# Altium PCB PCB_RE2-YM2413 REV.0.1a_2023-12-21.pcbdoc
Units mil, origin at the board's own origin, x right, y up, seen from the top; angles counter-clockwise.
Board outline 8165 x 6545 mil, 2 copper layers (Top Layer, Bottom Layer); 78 components, 47 nets, 264 pads, 3 vias.
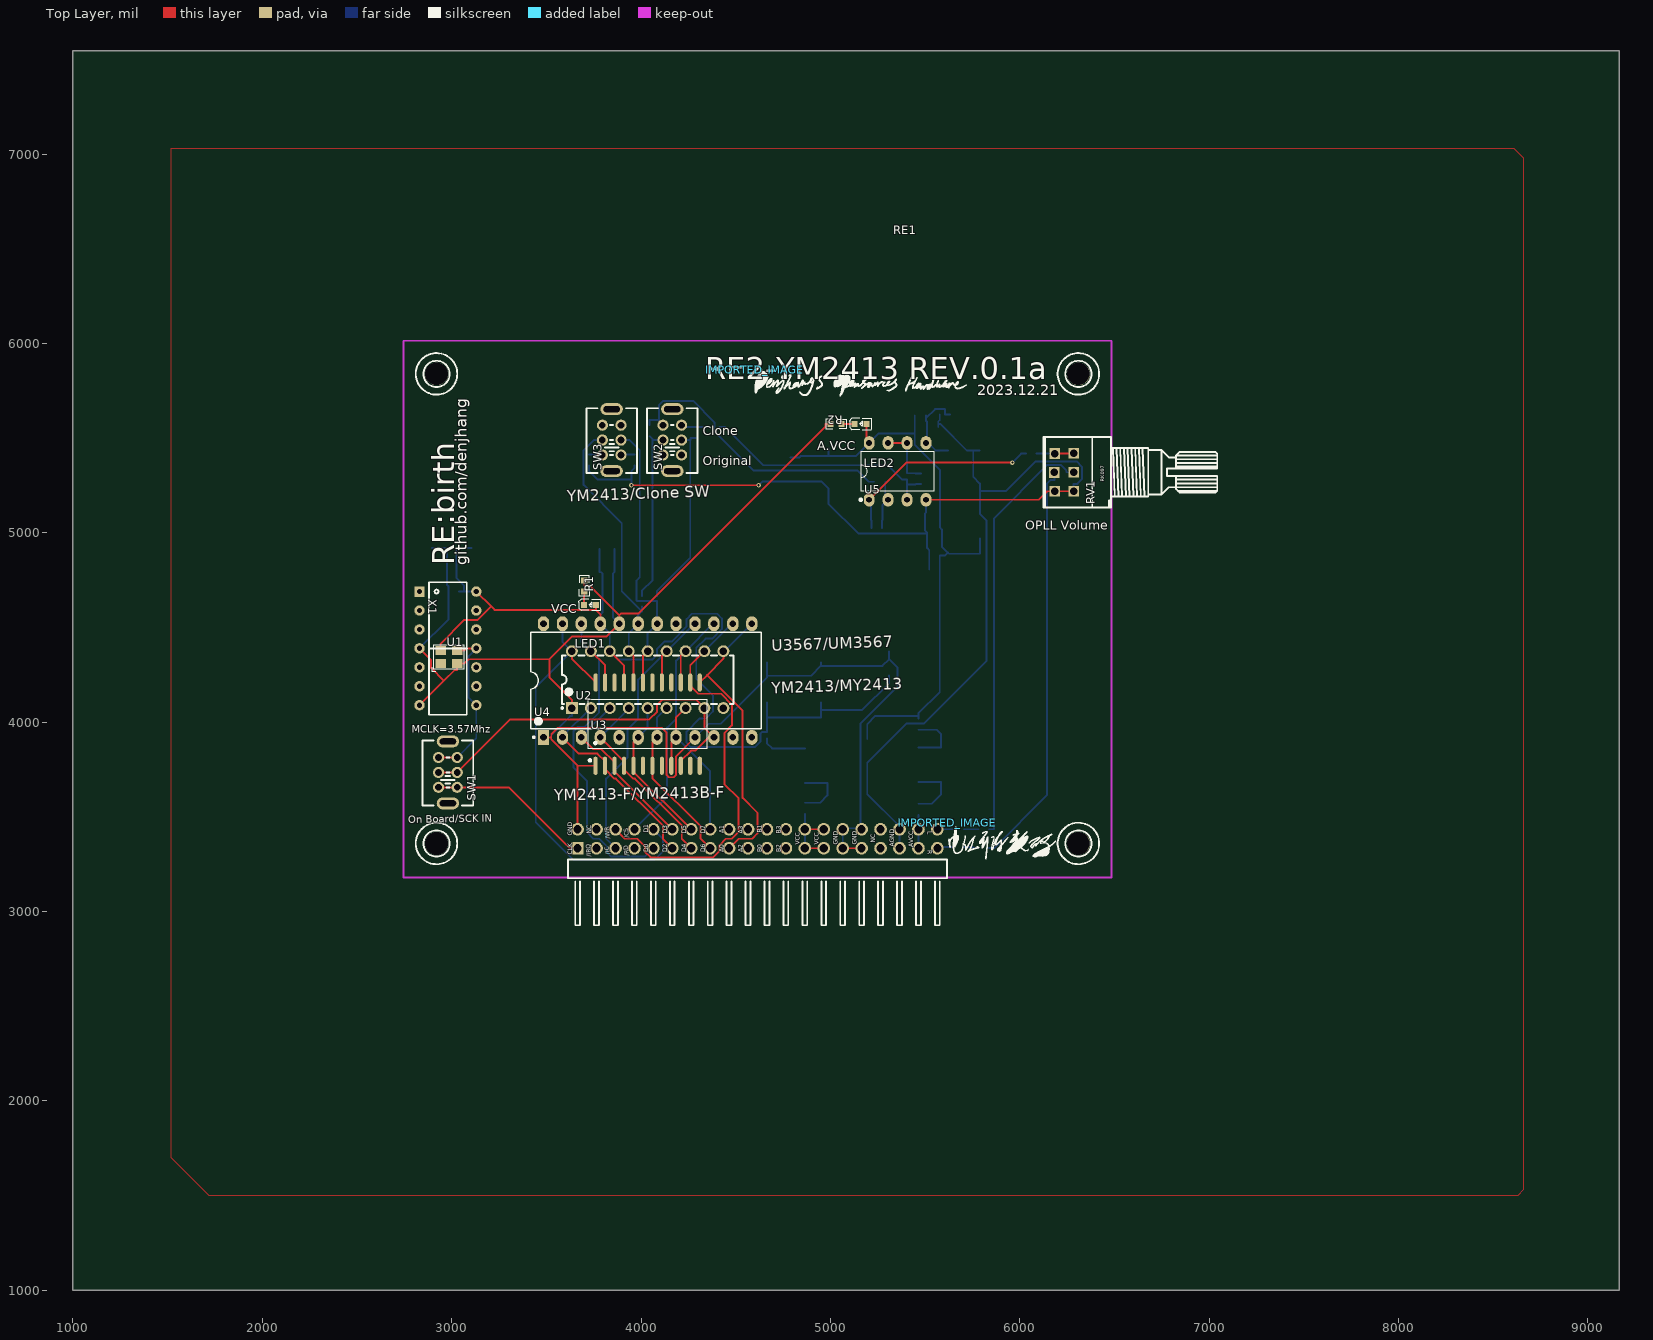
[diagram p0: Top Layer view]
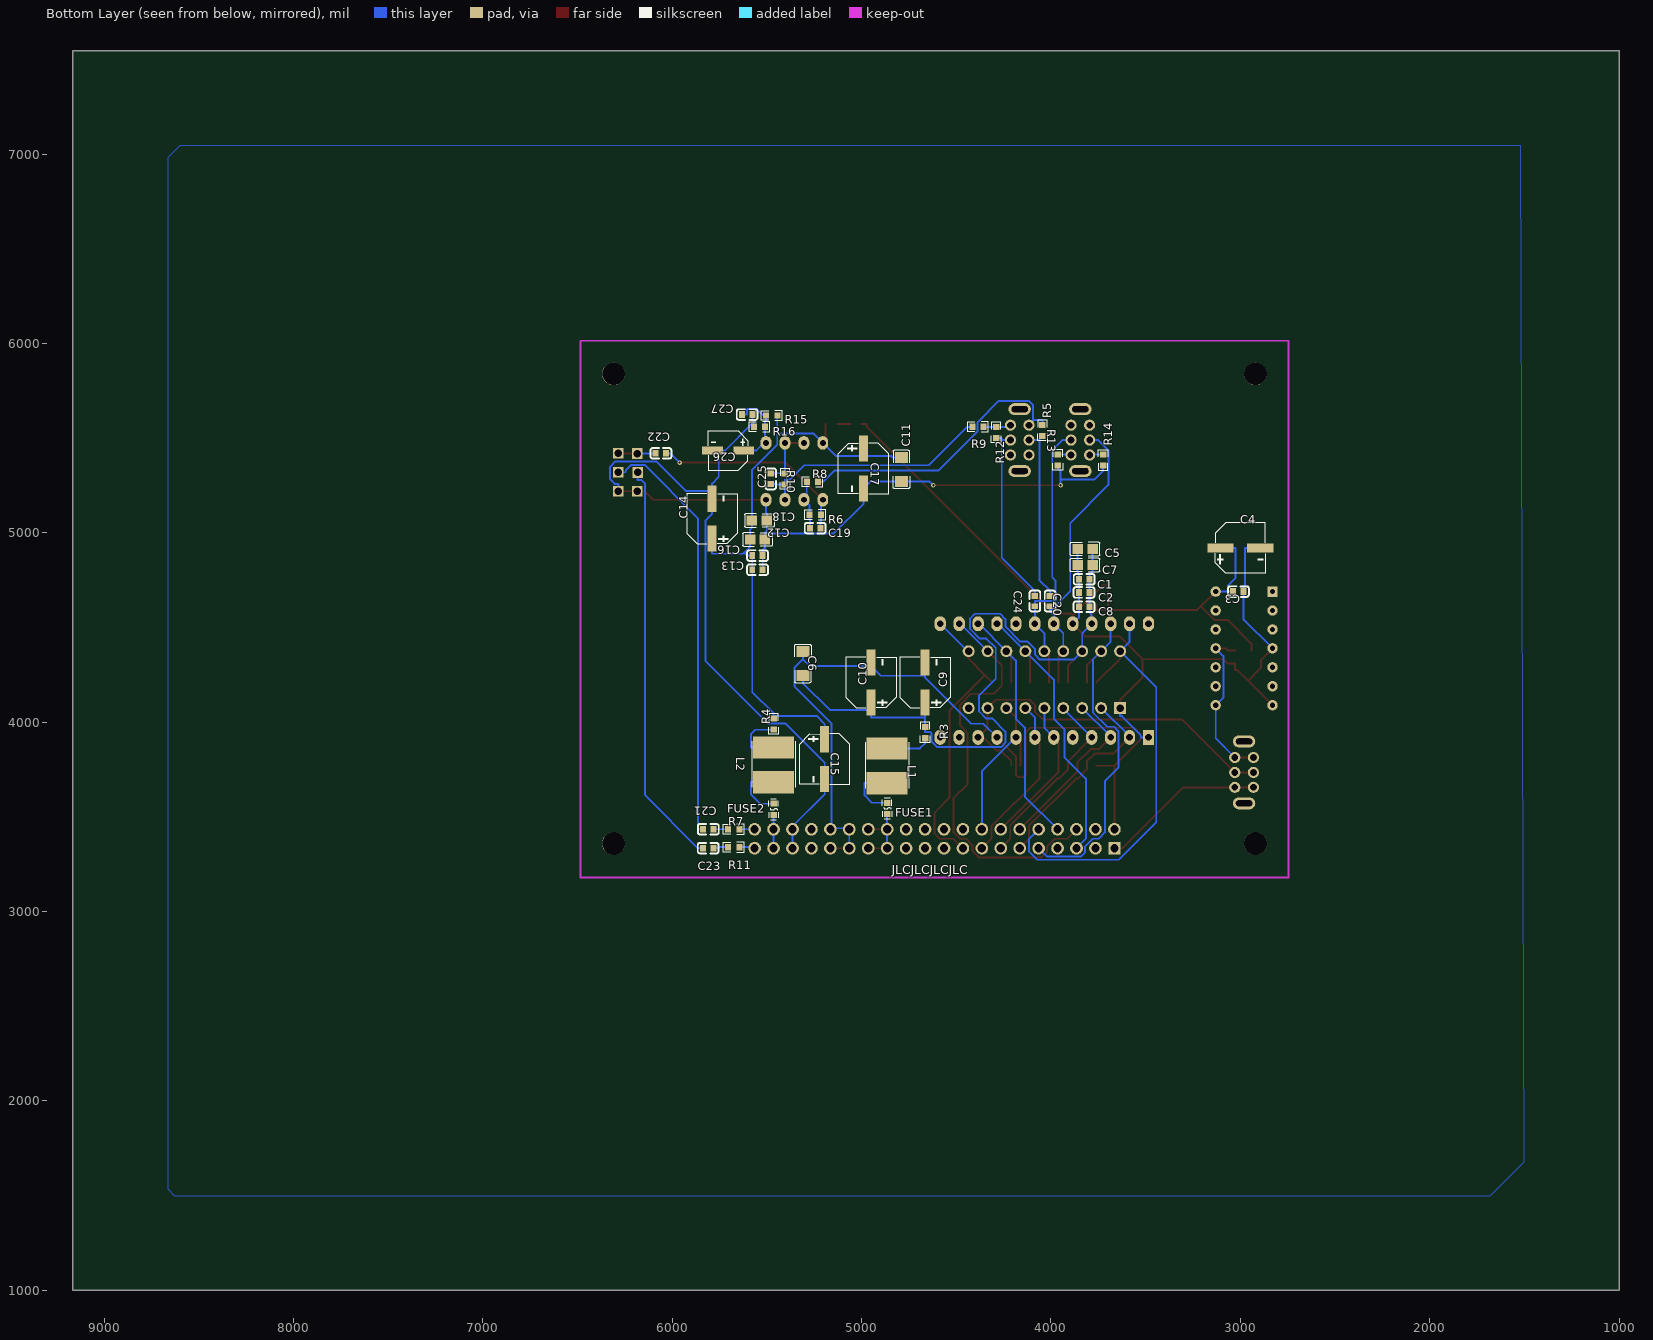
[diagram p1: Bottom Layer view, seen from below]

## Layer stack, top to bottom
Top Layer: signal copper (thickness not stored)
Dielectric: dielectric 12.6, FR-4, Dk 4.8
Bottom Layer: signal copper (thickness not stored)

## Board outline
9165,1000 1000,1000 1000,7545 9165,7545

## Components (designator, comment, footprint, x,y, rotation, side; value= is the part's Value field where it differs from the comment)
C1 "0.1u" C0603 3825,4755 r180 bottom
C2 "0.1u" C0603 3825,4685 r0 bottom
C3 "100u" C0603 3010,4690 r180 bottom
C4 "47u" CAP-SMD_BD6.3-L6.6-W6.6-LS7.2-FD 3000,4920 r0 bottom
C5 "0.1u" C0805 3820,4915 r0 bottom
C6 "100u" C1206 5310,4310 r90 bottom
C7 "47u" C0805 3820,4830 r0 bottom
C8 "0.1u" C0603 3825,4610 r0 bottom
C9 "470uF" CAP-SMD_BD6.3-L6.6-W6.6-FD 4665,4210 r270 bottom
C10 "220uF" CAP-SMD_BD6.3-L6.6-W6.6-LS7.2-FD 4950.01,4210.02 r270 bottom
C11 "100u" C1206 4790,5335 r270 bottom
C12 "47u" C0805 5550,4965 r180 bottom
C13 "0.1u" C0603 5550,4805 r180 bottom
C14 "470uF" CAP-SMD_BD6.3-L6.6-W6.6-FD 5790,5075 r270 bottom
C15 "220uF" CAP-SMD_BD6.3-L6.6-W6.6-LS7.2-FD 5195,3805 r90 bottom
C16 "0.1u" C0603 5550,4880 r180 bottom
C17 "220uF" CAP-SMD_BD6.3-L6.6-W6.6-LS7.2-FD 4990,5340 r90 bottom
C18 "47u" C0805 5540,5065 r180 bottom
C19 "120p" C0603 5245,5025 r0 bottom
C20 "4.7u" C0603 4005,4640 r90 bottom
C21 "4.7u" C0603 5810,3435 r180 bottom
C22 "4.7u" C0603 6060,5420 r180 bottom
C23 "4.7u" C0603 5810,3335 r0 bottom
C24 "4.7u" C0603 4085,4640 r90 bottom
C25 "120p" C0603 5480,5285 r270 bottom
C26 "10uF" CAP-SMD_BD5.0-L5.3-W5.3-LS6.0-FD 5705,5435 r180 bottom
C27 "0.1u" C0603 5605,5625 r180 bottom
FUSE1 "PPTC0.5A/24V-0603" F0603 4865,3545 r270 bottom
FUSE2 "PPTC0.5A/24V-0603" F0603 5465,3540 r270 bottom
IMPORTED_IMAGE "IMPORTED_IMAGE" IMPORTED_IMAGE 4599.81,5861.1 r0 top
IMPORTED_IMAGE "IMPORTED_IMAGE" IMPORTED_IMAGE 5617.49,3470.2 r0 top
L1 "470uH" IND-SMD_L5.8-W5.2 4865,3770 r90 bottom
L2 "470uH" IND-SMD_L5.8-W5.2 5465,3775 r90 bottom
LED1 "LED0603" LED0603-RD 3730,4620 r0 top
LED2 "LED0603" LED0603-RD 5160,5575 r0 top
R1 "20k" R0603#1 3700,4720 r90 top
R2 "20k" R0603#1 5030,5575 r180 top
R3 "10r" R0603#2 4665,3945 r270 bottom
R4 "10r" R0603#2 5465,3990 r270 bottom
R5 "20k" R0603#2 4045,5540 r270 bottom
R6 "220k" R0603#2 5245,5095 r0 bottom
R7 "2k2" R0603#2 5675,3435 r0 bottom
R8 "20k" R0603#2 5260,5270 r0 bottom
R9 "20k" R0603#2 4385,5560 r0 bottom
R10 "220k" R0603#2 5405,5285 r270 bottom
R11 "2k2" R0603#2 5675,3340 r0 bottom
R12 "20k" R0603#2 4290,5530 r270 bottom
R13 "20k" R0603#2 3965,5385 r270 bottom
R14 "20k" R0603#2 3725,5385 r90 bottom
R15 "10k" R0603#2 5475,5620 r0 bottom
R16 "10k" R0603#2 5540,5560 r0 bottom
RE1 "REBIRTH SOUND BOARD" "REBIRTH SOUND BOARD" 2741.16,3179.6 r0 top
RV1 "10kΩ" RK097G-DJ 6285,5320 r90 top
SW1 "SS-22D07" SW-TH_SS-22D07 2980,3735 r90 top
SW2 "SS-22D07" SW-TH_SS-22D07 4165,5490 r90 top
SW3 "SS-22D07" SW-TH_SS-22D07 3845,5490 r90 top
U1 "3.579545MHz" OSC-SMD_4P-L3.2-W2.5-BL 2985,4345 r0 top
U2 "YM2413" DIP-18_方孔IC插座 4035,4225 r0 top
U3 "YM2413-F" SOIC24-YMF276 4010,4010 r0 top
U4 "UM3567" DIP-24_L31.0-W13.5-P2.54-LS15.2-BL 4035,4220 r0 top
U5 "NE5532-DJ" DIP-8-DJ 5355,5325 r0 top
X1 "直插有源晶振" DIP14-有源晶振 2975,4390 r270 top
? "" ? 3205.04,2881.91 r0 top
? "" ? 6025.04,2705.59 r0 top
? "" ? 7279.18,3767.1 r0 top
? "" ? 6398.59,6161.46 r0 top
? "" ? 6686.17,5927.03 r0 top
? "" ? 2598.14,5928.19 r0 top
? "" ? 2832.57,6215.77 r0 top
? "" ? 2598.14,3268.19 r0 top
? "" ? 2832.57,3555.77 r0 top
? "" ? 7215.97,4931.81 r0 top
? "" ? 7387.65,5767.12 r0 top
? "" ? 7032.39,5569.72 r0 top
? "" ? 6633.02,3271.01 r0 top
? "" ? 6398.6,2983.43 r0 top
? "" ? 4614.93,6256.38 r0 top
? "" ? 6796.66,4596.92 r0 top

## Footprints (in the part's own frame and the unit in brackets; to place one, negate y for a bottom-side part, rotate by r counter-clockwise, add the part's x,y. Pads: shape width x height; smd on the part's side, far side on the other; paste and mask are expansions set on the pad)
C0603 [mm]
  rect 0.8x0.9 smd paste+0 mask+0.051: 1(0.7,0) 2(-0.7,0)
  silkscreen extent -1.39,-0.72 1.41,0.71
C0805 [mm]
  rect 1.41x1.35 smd paste-100 mask+0.051: 1(1,0) 2(-1,0)
  silkscreen extent -1.96,-0.9 1.96,0.9
C1206 [mm]
  rect 1.485x1.728 smd paste-100 mask+0.051: 1(1.593,0) 2(-1.593,0)
  silkscreen extent -2.56,-1.09 2.56,1.09
CAP-SMD_BD5.0-L5.3-W5.3-LS6.0-FD [mm]
  rect 2.8x1.1 smd paste+0 mask+0.051: 1(2.1,0) 2(-2.1,0)
  silkscreen extent -2.66,-2.65 2.66,2.62
CAP-SMD_BD6.3-L6.6-W6.6-FD [mm]
  rect 3.5x1.2 smd paste+0 mask+0.051: 1(2.67,0) 2(-2.67,0)
  silkscreen extent -3.38,-3.38 3.38,3.38
CAP-SMD_BD6.3-L6.6-W6.6-LS7.2-FD [mm]
  rect 3.5x1.2 smd paste+0 mask+0.051: 1(2.67,0) 2(-2.67,0)
  silkscreen extent -3.38,-3.38 3.38,3.38
DIP14-有源晶振 [mil]
  rect 55x55 hole 28 paste+0 mask+2: 1(-300,-145)
  round 55 hole 28 paste+0 mask+2: 2(-200,-145) 3(-100,-145) 4(0,-145) 5(100,-145) 6(200,-145) 7(300,-145) 8(300,155) 9(200,155) 10(100,155) 11(0,155) 12(-100,155) 13(-200,155) 14(-300,155)
  silkscreen extent -350,-95 350,105
DIP-8-DJ [mm]
  oval 1.46x1.825 hole 0.8 paste+0 mask+0.051: 1(-3.81,-3.81) 2(-1.27,-3.81) 3(1.27,-3.81) 4(3.81,-3.81) 5(3.81,3.81) 6(1.27,3.81) 7(-1.27,3.81) 8(-3.81,3.81)
  silkscreen extent -5.1,-3.96 4.87,2.67
DIP-18_方孔IC插座 [mm]
  rect 1.6x1.6 hole 1 paste+0 mask+0.051: 1(-10.16,-3.81)
  round 1.6 hole 1 paste+0 mask+0.051: 2(-7.62,-3.81) 3(-5.08,-3.81) 4(-2.54,-3.81) 5(0,-3.81) 6(2.54,-3.81) 7(5.08,-3.81) 8(7.62,-3.81) 9(10.16,-3.81) 10(10.16,3.81) 11(7.62,3.81) 12(5.08,3.81) 13(2.54,3.81) 14(0,3.81) 15(-2.54,3.81) 16(-5.08,3.81) 17(-7.62,3.81) 18(-10.16,3.81)
  silkscreen extent -11.58,-3.93 11.5,3.25
DIP-24_L31.0-W13.5-P2.54-LS15.2-BL [mm]
  rect 1.5x2 hole 0.9 paste+0 mask+0.051: 1(-13.97,-7.62)
  oval 1.5x2 hole 0.9 paste+0 mask+0.051: 2(-11.43,-7.62) 3(-8.89,-7.62) 4(-6.35,-7.62) 5(-3.81,-7.62) 6(-1.27,-7.62) 7(1.27,-7.62) 8(3.81,-7.62) 9(6.35,-7.62) 11(11.43,-7.62)
  oval 1.524x2 hole 0.9 paste+0 mask+0.051: 10(8.89,-7.62) 12(13.97,-7.62) 13(13.97,7.62) 14(11.43,7.62) 15(8.89,7.62) 16(6.35,7.62) 17(3.81,7.62) 18(1.27,7.62) 19(-1.27,7.62) 20(-3.81,7.62) 21(-6.35,7.62) 22(-8.89,7.62) 23(-11.43,7.62) 24(-13.97,7.62)
  silkscreen extent -15.66,-7.74 15.24,6.48
F0603 [mil]
  rect 31.75x34.02 smd paste-3937.01 mask+2: 1(29.66,0) 2(-29.66,0)
  silkscreen extent -55,-25 55,25
IMPORTED_IMAGE [mil]
  silkscreen extent 0,-139 1120,0
IND-SMD_L5.8-W5.2 [mm]
  rect 3x5.5 smd paste-100 mask+0.05: 1(-2.325,0) 2(2.325,0)
  silkscreen extent -3,-2.92 3.15,2.92
LED0603-RD [mm]
  rect 0.8x0.8 smd paste+0 mask+0.051: 1(-0.799,-0.003) 2(0.799,0.004)
  silkscreen extent -1.49,-0.75 1.39,0.76
OSC-SMD_4P-L3.2-W2.5-BL [mm]
  rect 1.4x1.2 smd paste+0 mask+0.051: 1(-1.1,-0.875) 2(1.1,-0.875) 3(1.1,0.875) 4(-1.1,0.875)
  silkscreen extent -2.29,-1.9 2.03,1.65
R0603#1 [mil]
  rect 31.75x34.02 smd paste-3937.01 mask+2: 1(-29.65,0) 2(29.65,0)
  silkscreen extent -55,-26 55,26
R0603#2 [mil]
  rect 31.75x34.02 smd paste-3937.01 mask+2: 1(29.66,0) 2(-29.66,0)
  silkscreen extent -55,-26 55,26
"REBIRTH SOUND BOARD" [mil]
RK097G-DJ [mil]
  rect 56x56 hole 39.4 paste+0 mask+4: 1(-100,0) 2(0,0) 3(100,0) 4(-100,100) 5(-1,102) 6(99,100)
  silkscreen extent -187,-758 187,160
SOIC24-YMF276 [mil]
  oval 22.05x95.74 smd paste+0 mask+2: 1(-250,-240) 2(-200,-240) 3(-150,-240) 4(-100,-240) 5(-50,-240) 6(0,-240) 7(50,-240) 8(100,-240) 9(150,-240) 10(200,-240) 11(250,-240) 12(300,-240) 13(300,200) 14(250,200) 15(200,200) 16(150,200) 17(100,200) 18(50,200) 19(0,200) 20(-50,200) 21(-100,200) 22(-150,200) 23(-200,200) 24(-250,200)
  silkscreen extent -288,-217 336,112
SW-TH_SS-22D07 [mm]
  round 1.5 hole 0.9 paste+0 mask+0.051: 1(-2,1.25) 2(0,1.25) 3(2,1.25) 4(-2,-1.25) 5(0,-1.25) 6(2,-1.25)
  oval 1.6x3 hole 0.8 slot 2.2 at 90 deg paste+0 mask+0.051: 7(4.15,0) 8(-4.15,0)
  silkscreen extent -4.43,-3.4 4.27,3.4
? [mil]

## Free pads (board coordinates)
  rect 62.99x66.93 hole 43.31 paste+0 mask+2: 1(3665.08,3334.6)
  round 66.93 hole 43.31 paste+0 mask+2: 2(3665.08,3434.6) 3(3765.08,3334.6) 4(3765.08,3434.6) 5(3865.08,3334.6) 6(3865.08,3434.6) 7(3965.08,3334.6) 8(3965.08,3434.6) 9(4065.08,3334.6) 10(4065.08,3434.6) 11(4165.08,3334.6) 12(4165.08,3434.6) 13(4265.08,3334.6) 14(4265.08,3434.6) 15(4365.08,3334.6) 16(4365.08,3434.6) 17(4465.08,3334.6) 18(4465.08,3434.6) 19(4565.08,3334.6) 20(4565.08,3434.6) 21(4665.08,3334.6) 22(4665.08,3434.6) 23(4765.08,3334.6) 24(4765.08,3434.6) 25(4865.08,3334.6) 26(4865.08,3434.6) 27(4965.08,3334.6) 28(4965.08,3434.6) 29(5065.08,3334.6) 30(5065.08,3434.6) 31(5165.08,3334.6) 32(5165.08,3434.6) 33(5265.08,3334.6) 34(5265.08,3434.6) 35(5365.08,3334.6) 36(5365.08,3434.6) 37(5465.08,3334.6) 38(5465.08,3434.6) 39(5565.08,3334.6) 40(5565.08,3434.6)
  round 119.37 hole 119.37 unplated paste+0: ""(2920.01,3359.6) ""(2920.01,5839.6) ""(6310.01,3359.6) ""(6310.01,5839.6)

## Via types
v1: diameter 24.02, hole 12.01, Top Layer to Bottom Layer, tented both sides, 3 vias

## Nets (pads, with @x,y where several pads share a name; then routed paths per layer and width w, separated by ;. In a path a pad name is that pad's centre, name@x,y a point inside that pad or via, vN(x,y) a via of type N, cw(c..) or ccw(c..) an arc to the next point about the centre after c; other vN are vias at no path point)
/IC: pad.5 U2.13 U3.17 U4.16 | length 1579
  Top Layer w10: U3.17 4110,4350 U2.13
  Bottom Layer w10: pad.5 3815.1,3384.58 3815.1,3701.78 3929.36,3816.04 3929.36,3963.15 3985.04,4018.83 3985.04,4225.04 U2.13 4280,4520 U4.16
/WR: pad.6 U2.11 U3.14 U4.14 | length 2206
  Top Layer w10: pad.6 3915.08,3384.6 3980.04,3384.59 4020.41,3344.22 4020.41,3316.11 4050.16,3286.36 4380.9,3286.36 4415.08,3320.54 4415.08,3350.99 4448.69,3384.6 4478.27,3384.6 4515.08,3421.41 4515.08,3598.66 4440.5,3673.24 4440.5,3942.95 4480.35,3982.8 4480.35,4092.46 4422.46,4150.35 4301.36,4150.35 4260,4191.71 U3.14 4260,4300 U2.11
  Bottom Layer w10: U2.11 4480,4520 U4.14
A0: pad.17 U2.10 U3.13 U4.13 | length 1555.5
  Top Layer w10: U3.13 4349.08,4249.08 ; U2.10 4435,4335 4349.08,4249.08 ; pad.17 4515.08,3384.6 4586.53,3384.6 4615.08,3413.15 4615.08,3521.37 4536.58,3599.87 4536.58,4061.57 4349.08,4249.08
  Bottom Layer w10: U2.10 4440,4375 U4.13
A.GND: C11.1 C12.1 C13.1 C14.2 C15.2 C16.1 C17.2 C18.1 C26.2 C27.1 pad.35 pad.36 R13.1 R14.2 R16.1 RV1.1 RV1.4 U5.4 | length 6929.2
  Top Layer w10: v1(3949.11,5251.4) v1(4620.86,5251.4) ; U5.4 6100.85,5175 6145.85,5220 RV1.4 RV1.1
  Bottom Layer w10: R14.2 3725,5328.32 3772.39,5280.93 3949.11,5280.93 ; v1(3949.11,5251.4) 3949.11,5280.93 ; R13.1 3965,5341.83 3949.11,5325.94 3949.11,5280.93 ; v1(4620.86,5251.4) 4641.76,5272.3 4744.83,5272.3 4767.42,5272.3 C11.1 4952.59,5272.3 C17.2 4990,5154.84 5148.77,4996.07 5292.95,4996.07 5293.1,4996.22 5506.97,4996.22 5509.88,4999.13 5509.88,5002.73 ; pad.35 pad.36 5365.08,3449.75 5195,3619.83 C15.2 5195,3785.86 5401.71,3992.57 5492.99,3992.57 5824.83,4324.41 5824.83,5065.24 5790,5100.07 C14.2 5790,5200.14 C14.2@5790,5220.15 ; U5.4 5505,5107.1 5500.63,5102.73 C18.1 5500.63,5011.98 5509.88,5002.73 ; C13.1 C16.1 5522.44,4908.87 5510.63,4920.68 C12.1 5510.63,5002.73 5509.88,5002.73 ; R16.1 R16.1@5569.66,5574.08 ; C27.1 5577.44,5595.94 5569.66,5588.16 R16.1@5569.66,5574.08 ; C26.2 C26.2@5754.55,5435 ; RV1.1 6285,5259.15 6304.57,5259.15 6328.79,5283.37 6328.79,5348.66 6299.87,5377.58 6084.26,5377.58 5926.83,5220.15 C14.2@5790,5220.15 ; R16.1@5569.66,5574.08 5582.33,5574.08 5721.41,5435 C26.2@5754.55,5435 ; C26.2@5754.55,5435 5754.55,5295.62 5790,5260.17 C14.2@5790,5220.15
A.VCC: C11.2 C12.2 C13.2 C14.1 C15.1 C16.2 C17.1 C18.2 LED2.2 R4.2 R15.2 U5.8 | length 3227.1
  Top Layer w10: LED2.2 5191.47,5488.53 U5.8
  Bottom Layer w10: C11.2 4835.17,5397.7 4842.57,5405.1 C17.1@4990,5405.1 ; C17.1 C17.1@4990,5405.1 ; C15.1 5195,3990.16 5238.01,4033.17 R4.2@5465,4033.17 ; R15.2 5445.34,5525.57 ; R4.2 R4.2@5465,4033.17 ; C14.1 5790,4889.84 5626.81,4889.84 5620.56,4896.1 ; C17.1@4990,5405.1 5135.1,5405.1 U5.8 5255.57,5525.57 5445.34,5525.57 ; 5445.34,5525.57 5445.34,5465.73 5579.37,5331.7 C18.2 5579.37,5027.28 5589.37,5017.28 C12.2 5589.37,4927.28 5620.56,4896.1 ; R4.2@5465,4033.17 5465,4046.68 5577.56,4159.24 C13.2 C16.2 5604.46,4880 5620.56,4896.1
A.VCC-IN: FUSE2.1 pad.37 pad.38 | length 175.8
  Bottom Layer w10: FUSE2.1 5465,3483.32 5465.08,3483.24 pad.38 pad.37
BSEL: pad.8 U2.12 U3.15 U4.15 | length 1437.6
  Top Layer w10: U3.15 4210,4350 U2.12
  Bottom Layer w10: pad.8 4137.41,3606.93 4137.41,3971.28 4185.08,4018.95 4185.08,4325.08 U2.12 4380,4520 U4.15
C21_1: C21.1 R7.1 | length 77.8
  Bottom Layer w10: R7.1 C21.1
C23_2: C23.2 R11.1 | length 79.9
  Bottom Layer w10: R11.1 5750.54,3340 5755.54,3335 C23.2
D0: pad.9 U2.17 U3.23 U4.22 | length 1884.3
  Top Layer w10: U2.17 3810,4300 U3.23
  Bottom Layer w10: U4.22 3685,4425 U2.17 3778.77,4331.23 3778.77,4051.32 3703.48,3976.03 3666.27,3976.03 3643.82,3953.58 3643.82,3760.77 3715.08,3689.51 3715.08,3418.21 3748.69,3384.6 3779.41,3384.6 3820.41,3343.6 3820.41,3311.75 3842.31,3289.85 4020.33,3289.85 pad.9
D1: pad.10 U2.18 U3.24 U4.23 | length 2273.8
  Top Layer w10: U2.18 3635,4335 U3.24
  Bottom Layer w10: U4.23 3585,4425 U2.18 3444.27,4184.27 3444.27,3472.12 3642.75,3273.64 4071.98,3273.64 4115.08,3316.74 4115.08,3384.6 pad.10
D2: pad.11 U2.2 U3.2 U4.2 | length 1106
  Top Layer w10: U4.2 3670.29,3834.71 3769.35,3834.71 3810,3794.06 U3.2 3810,3751.03 3858.75,3702.28 3867.53,3702.28 4115.08,3454.73 4115.08,3384.6 pad.11
  Bottom Layer w10: U4.2 3585,3925 U2.2
D3: pad.12 U2.3 U3.3 U4.3 | length 926.8
  Top Layer w10: U4.3 3747.04,3857.96 3790.45,3857.96 3860,3788.41 U3.3 3860,3739.68 pad.12
  Bottom Layer w10: U4.3 3685,3925 U2.3
D4: pad.13 U2.4 U3.4 U4.4 | length 1006.4
  Top Layer w10: U4.4 3910,3795 U3.4 3910,3751.19 3958.91,3702.28 3967.53,3702.28 4215.08,3454.73 4215.08,3384.6 pad.13
  Bottom Layer w10: U4.4 3935,4070 U2.4
D5: pad.14 U2.5 U3.5 U4.6 | length 797.8
  Top Layer w10: U4.6 3960,3895 U3.5 3960,3739.68 pad.14
  Bottom Layer w10: U4.6 4035,3970 U2.5
D6: pad.15 U2.6 U3.7 U4.7 | length 897.8
  Top Layer w10: U4.7 4060,3895 U3.7 4060,3705.24 4315.08,3450.16 4315.08,3384.6 pad.15
  Bottom Layer w10: U4.7 4085,4025 U2.6
D7: pad.16 U2.7 U3.9 U4.8 | length 896.1
  Top Layer w10: U3.9 4160,3895 U4.8 4185,4025 U2.7
  Bottom Layer w10: U4.8 4365.08,3739.92 pad.16
FUSE1_2: FUSE1.2 L1.1 | length 319.8
  Bottom Layer w10: FUSE1.2 4945.5,3574.66 4984.42,3613.58 4984.42,3678.45 L1.1@4865,3678.45
FUSE2_2: FUSE2.2 L2.1 | length 323.5
  Bottom Layer w10: FUSE2.2 5534.64,3569.66 5584.42,3619.44 5584.42,3683.45 L2.1@5465,3683.45
GND: C1.2 C2.1 C3.1 C4.2 C5.1 C6.1 C7.1 C8.1 C9.2 C10.2 pad.2 pad.29 pad.30 pad.31 pad.32 R1.2 R2.2 U1.2 U2.1 U3.1 U4.1 U4.9 U4.20 X1.4 X1.7 | length 9460.8
  Top Layer w10: X1.7 2959.09,4219.09 ; X1.4 2891.44,4328.56 2891.44,4286.73 2959.09,4219.09 ; U4.1 3525.68,3920 ; U2.1 3635,4117.65 3516.21,4236.44 3516.21,4332.64 ; pad.2 3665.07,3770 ; R1.2 3700,4722.63 3727.03,4722.63 3885,4564.66 ; U3.1 3665.07,3770 ; U4.9 4184.86,3819.86 4184.86,3721.94 4172.26,3709.34 4147.42,3709.34 4135,3721.76 4135,3945.54 4109.97,3970.57 3560.41,3970.57 3525.68,3935.84 3525.68,3920 ; R2.2 4973.32,5575 4973.32,5561.49 3987.05,4575.22 3895.56,4575.22 3885,4564.66 ; pad.29 pad.31 ; 2959.09,4219.09 3015.78,4275.78 3028.31,4275.78 U1.2 3067.02,4310.55 3089.11,4332.64 3516.21,4332.64 ; 3516.21,4332.64 3636.47,4452.9 3817.9,4452.9 U4.20 3885,4564.66 ; 3525.68,3920 3525.68,3909.39 3665.07,3770
  Bottom Layer w10: X1.4 2982.44,4542.44 C3.1 2982.44,4718.87 2974.93,4726.38 2974.93,4920 C4.2 ; U4.1 3525.68,3920 3525.68,3932.44 3625.59,4032.35 3635,4032.35 U2.1 ; C5.1 C7.1 3859.37,4792.28 3852.56,4785.47 C1.2 C2.1 C8.1 3852.56,4552.44 U4.20 ; U4.9 4357.09,3992.09 4421.8,3992.09 4665,4235.29 4665,4245.61 ; C9.2 4665,4245.61 ; C10.2 C10.2@4950.01,4297.36 ; pad.29 pad.30 5070.34,3439.86 pad.32@5159.82,3439.86 ; pad.32 pad.32@5159.82,3439.86 ; C6.1 5310,4332.32 ; 4665,4245.61 4898.26,4245.61 C10.2@4950.01,4297.36 ; C10.2@4950.01,4297.36 5275.04,4297.36 5310,4332.32 ; pad.32@5159.82,3439.86 5159.82,3994.62 5355.23,4190.03 5355.23,4287.09 5310,4332.32
LED1_1: LED1.1 R1.1 | length 71.1
  Top Layer w10: LED1.1 3698.52,4661.84 3700,4663.32 R1.1
MCLK: SW1.2 SW1.5 U2.8 U3.10 U4.10 | length 2021.4
  Top Layer w10: SW1.2 SW1.5 3308.85,4014.62 4043.36,4014.62 4085.02,4056.28 4085.02,4091.58 4112.01,4118.57 4291.43,4118.57 U2.8 4335,3970 U4.10@4370.34,3934.66 ; U3.10 4210,3796.15 4264.06,3850.21 4285.89,3850.21 U4.10@4370.34,3934.66 ; U4.10 U4.10@4370.34,3934.66
MCLK-BOARD: SW1.3 SW1.6 U1.3 X1.8 X1.11 | length 855.9
  Top Layer w10: SW1.3 SW1.6 ; U1.3@3028.31,4379.45 3067.02,4379.45 3077.57,4390 X1.11
  Bottom Layer w10: SW1.6 3130,3914.51 X1.8 3089.68,4130.32 3089.68,4349.68 X1.11
MCLK-IN: pad.1 SW1.1 SW1.4 | length 867.5
  Top Layer w10: SW1.1@2930.78,3656.25 3029.22,3656.25 3300.78,3656.25 3622.43,3334.6 pad.1
OPLL-MO: C24.2 SW3.5 U2.14 U3.19 U4.18 | length 1493
  Top Layer w10: U3.19 4010,4350 U2.14
  Bottom Layer w10: SW3.5 3939.74,5490 3993.22,5436.52 3993.22,4764.97 3976.07,4747.82 3976.07,4642.31 3978.98,4639.4 4084.94,4639.4 4085,4639.34 C24.2 U4.18 4035,4470 U2.14
OPLL-RO: C20.2 SW3.2 U2.15 U3.20 U4.19 | length 1541.6
  Top Layer w10: U2.15 3960,4350 U3.20
  Bottom Layer w10: SW3.2 3750.26,5490 3696.78,5436.52 3696.78,5253.41 3898.34,5051.85 3898.34,4692.2 4005,4585.54 ; U2.15 3935,4470 U4.19 3985,4565.54 4005,4585.54 ; C20.2 4005,4585.54
R2_1: LED2.1 R2.1 | length 68.9
  Top Layer w10: R2.1 5101.48,5575 5101.62,5574.86 LED2.1
R3_1: L1.2 R3.1 | length 238.1
  Bottom Layer w10: R3.1 4665,3888.32 4691.77,3861.55 L1.2
R4_1: L2.2 R4.1 | length 318.9
  Bottom Layer w10: L2.2 5584.42,3866.55 5584.42,3936.9 5560.98,3960.34 R4.1
R-1-MO: C24.1 R12.1 SW2.5 | length 979.7
  Bottom Layer w10: C24.1 4085,4694.46 4259.77,4869.23 4259.77,5490 ; SW2.5 4259.77,5490 ; R12.1 4261.84,5500.34 4261.84,5492.07 4259.77,5490
R-1-RO: C20.1 R5.1 SW2.2 | length 927.4
  Bottom Layer w10: C20.1 4005,4694.46 4060.98,4750.44 4060.98,5490 ; R5.1 4060.98,5494.36 4060.98,5490 ; SW2.2 4060.98,5490
R-2-MO: R9.2 R12.2 SW2.6 | length 145
  Bottom Layer w10: SW2.6 4223.3,5559.66 R12.2 4327.98,5559.66 4328.32,5560 R9.2
R-2-RO: R5.2 R8.2 SW2.3 | length 1539.7
  Bottom Layer w10: R5.2 4045,5596.68 4094.74,5596.68 ; SW2.3 4094.74,5589.79 4094.74,5596.68 ; R8.2 5203.32,5270 5144.42,5328.9 4594.98,5328.9 4387.45,5536.43 4387.45,5584.06 4274.99,5696.52 4118.26,5696.52 4094.74,5673 4094.74,5596.68
RV1_2: C21.2 RV1.2 | length 2228.3
  Bottom Layer w10: C21.2 5864.46,3435 5864.46,5077.1 6146.51,5359.15 6216.5,5359.15 6245.85,5329.8 6245.85,5320 RV1.2
RV1_3: C22.2 RV1.3 RV1.6 | length 198.3
  Top Layer w10: RV1.6 6244.85,5419 6245.85,5420 RV1.3
  Bottom Layer w10: C22.2 6144.85,5420 6145.85,5419 RV1.6
RV1_5: C23.1 RV1.5 | length 2154.3
  Bottom Layer w10: C23.1 5864.46,3335 6143.85,3614.39 6143.85,5260.28 6163.42,5279.85 6183,5279.85 RV1.5
SLOT.L: pad.40 R7.2 | length 80.4
  Bottom Layer w10: pad.40 5565.48,3435 R7.2
SLOT.R: pad.39 R11.2 | length 82.5
  Bottom Layer w10: pad.39 5570.48,3340 R11.2
SW3_1: R14.1 SW3.1 | length 72.2
  Bottom Layer w10: R14.1 3792.39,5414.66 SW3.1
SW3_4: R13.2 SW3.4 | length 72.2
  Bottom Layer w10: SW3.4 3897.62,5414.66 R13.2
U5_1: C19.2 C22.1 R6.2 U5.1 | length 1086.8
  Top Layer w10: U5.1 5401.14,5371.14 v1(5961.32,5371.14)
  Bottom Layer w10: U5.1 5215.34,5164.66 R6.2 5215.34,5066.84 5217.44,5064.74 C19.2 ; v1(5961.32,5371.14) 6005.54,5415.36 6005.54,5420 C22.1
U5_2: C19.1 R6.1 R8.1 U5.2 | length 264.8
  Bottom Layer w10: C19.1 5272.56,5064.74 5274.66,5066.84 R6.1 5274.66,5144.66 U5.2 5289.66,5190.34 R8.1
U5_3: C25.1 R9.1 R10.1 U5.3 | length 1288.6
  Bottom Layer w10: R9.1 4441.68,5560 4644.42,5357.26 5303.08,5357.26 5377.97,5282.37 5405,5282.37 R10.1 ; U5.3 R10.1 ; C25.1 5451.13,5257.44 5449.03,5255.34 R10.1
U5_5: C26.1 C27.2 R15.1 R16.2 U5.5 | length 457
  Bottom Layer w10: R15.1 R15.1@5504.66,5605.92 ; U5.5 U5.5@5510.34,5480.34 ; C26.1 5556.06,5435 5510.72,5480.34 U5.5@5510.34,5480.34 ; C27.2 5605.66,5625 5605.66,5651.9 5603.63,5653.93 5552.67,5653.93 R15.1@5504.66,5605.92 ; R15.1@5504.66,5605.92 5504.66,5591.84 5506.66,5591.84 5510.34,5588.16 R16.2 U5.5@5510.34,5480.34
VBIAS: C25.2 R10.2 U5.6 U5.7 | length 336.2
  Top Layer w10: U5.7 U5.6
  Bottom Layer w10: U5.6 R10.2 5449.03,5314.66 5451.13,5312.56 C25.2
VCC: C1.1 C2.2 C3.2 C4.1 C5.2 C6.2 C7.2 C8.2 C9.1 C10.1 LED1.2 R3.2 U1.4 U2.16 U3.21 U4.21 X1.14 | length 5437.5
  Top Layer w10: U1.4@2941.69,4379.45 2941.69,4414.23 3067.46,4540 3137.49,4540 3208.75,4611.26 ; X1.14 3208.75,4611.26 ; LED1.2 3761.47,4597.16 3761.47,4593.24 3761.14,4592.91 ; U4.21 3785,4569.05 3761.14,4592.91 ; U2.16 3910,4300 U3.21 ; 3208.75,4611.26 3227.09,4592.91 3761.14,4592.91
  Bottom Layer w10: C3.2 3064.46,4690 ; C4.1 3025.07,4920 3025.07,4762.16 3064.46,4722.77 3064.46,4690 ; X1.14 3064.46,4690 ; C5.2 C7.2 3780.63,4792.28 3789.03,4792.28 3797.44,4783.87 C1.1 C2.2 C8.2 3797.44,4581.13 3785,4568.69 U4.21 3835,4470 U2.16 3878.83,4331.17 4058.06,4331.17 4085.02,4358.13 4085.02,4387.7 4123.54,4426.22 4161.09,4426.22 4240.67,4505.8 4240.67,4544.82 4268.71,4572.86 4402.45,4572.86 4427.66,4547.65 4427.66,4492.8 4376.26,4441.4 4341.04,4441.4 4291.77,4392.13 4291.77,4228.98 4379.35,4141.4 4379.35,4056.62 4341.55,4018.82 4308.74,4018.82 4240.43,3950.51 4240.43,3892.31 4263.74,3869 4601.68,3869 4631.51,3898.83 4631.51,3941.17 4637.97,3947.63 4665,3947.63 R3.2 4665,4024.84 ; C9.1 4665,4024.84 ; C10.1 C10.1@4950.01,4064.88 ; C6.2 5310,4206.92 5167.96,4064.88 C10.1@4950.01,4064.88 ; 4665,4024.84 4950,4024.84 C10.1@4950.01,4064.88
VCC-IN: FUSE1.1 pad.25 pad.26 pad.27 pad.28 | length 380.8
  Top Layer w10: pad.25 pad.27 ; pad.26 pad.28
  Bottom Layer w10: FUSE1.1 4865,3488.32 4865.08,3488.24 pad.26 pad.25
pads on no net: SW1.7 SW1.8 SW2.1 SW2.4 SW2.7 SW2.8 SW3.3 SW3.6 SW3.7 SW3.8 U1.1 U2.9 U3.6 U3.8 U3.11 U3.12 U3.16 U3.18 U3.22 U4.5 U4.11 U4.12 U4.17 U4.24 X1.1 X1.2 X1.3 X1.5 X1.6 X1.9 X1.10 X1.12 X1.13

## Polygon pours and split planes (outlines as drawn)
A.GND on Bottom Layer (solid): 1520,7045 8600,7045 8665,6980 8665,1535 8630,1500 1680,1500 1500,1680
GND on Top Layer (solid): 1520,7030 8610,7030 8660,6980 8660,1530 8630,1500 1720,1500 1520,1700

## Silkscreen, mask and mechanical layers (free items; w line width, h text height)
Top Overlay:
  circle w10: c2920,5839.6 r109.66
  circle w10: c2920,5839.6 r69.46
  circle w10: c6310,5839.6 r109.66
  circle w10: c6310,5839.6 r69.46
  circle w10: c6310,3359.6 r109.66
  circle w10: c6310,3359.6 r69.46
  circle w10: c2920.01,3359.6 r109.66
  circle w10: c2920.01,3359.6 r69.46
  lines w10: 3652.38,3159.8 3652.38,2927.91 3677.68,2927.91 3677.68,3159.8 ; 3752.39,3159.8 3752.39,2927.91 3777.68,2927.91 3777.68,3159.8 ; 3852.39,3159.8 3852.39,2927.91 3877.68,2927.91 3877.68,3159.8 ; 3952.38,3159.8 3952.38,2927.91 3977.68,2927.91 3977.68,3159.8 ; 4052.38,3159.8 4052.38,2927.91 4077.68,2927.91 4077.68,3159.8 ; 4152.38,3159.8 4152.38,2927.91 4177.68,2927.91 4177.68,3159.8 ; 4252.38,3159.8 4252.38,2927.91 4277.68,2927.91 4277.68,3159.8 ; 4352.38,3159.8 4352.38,2927.91 4377.68,2927.91 4377.68,3159.8 ; 4452.38,3159.8 4452.38,2927.91 4477.68,2927.91 4477.68,3159.8 ; 4552.38,3159.8 4552.38,2927.91 4577.68,2927.91 4577.68,3159.8 ; 4652.38,3159.8 4652.38,2927.91 4677.68,2927.91 4677.68,3159.8 ; 4752.38,3159.8 4752.38,2927.91 4777.68,2927.91 4777.68,3159.8 ; 4852.38,3159.8 4852.38,2927.91 4877.68,2927.91 4877.68,3159.8 ; 4952.38,3159.8 4952.38,2927.91 4977.68,2927.91 4977.68,3159.8 ; 5052.38,3159.8 5052.38,2927.91 5077.68,2927.91 5077.68,3159.8 ; 5152.38,3159.8 5152.38,2927.91 5177.68,2927.91 5177.68,3159.8 ; 5252.38,3159.8 5252.38,2927.91 5277.68,2927.91 5277.68,3159.8 ; 5352.38,3159.8 5352.38,2927.91 5377.68,2927.91 5377.68,3159.8 ; 5452.38,3159.8 5452.38,2927.91 5477.68,2927.91 5477.68,3159.8 ; 5552.38,3159.8 5552.38,2927.91 5577.68,2927.91 5577.68,3159.8 ; 3615.08,3175.93 3615.08,3274.36 5615.07,3274.36 5615.07,3175.93 3615.08,3175.93
  text "RE2-YM2413 REV.0.1a" at 4340,5810.94 h118.11
  text "2023.12.21" at 5775,5727.44 h55.12
  text "Clone" at 4325,5516.38 h47.24
  text "A.VCC" at 4930,5436.38 h47.24
  text "Original" at 4325,5356.38 h47.24
  text "YM2413/Clone SW" at 3611.03,5165.49 h59.05 r2
  text "OPLL Volume" at 6030,5016.38 h47.24
  text "RE:birth" at 3014.07,4829.6 h118.11 r90
  text "github.com/denjhang" at 3079.54,4829.6 h59.05 r90
  text "VCC" at 3525,4576.38 h47.24
  text "U3567/UM3567" at 4690.98,4375.49 h59.05 r2
  text "YM2413/MY2413" at 4691.03,4150.49 h59.05 r2
  text "MCLK=3.57Mhz" at 2790,3945.32 h39.37
  text "YM2413-F/YM2413B-F" at 3540.52,3585.48 h59.05 r1
  text "On Board/SCK IN" at 2770.34,3465.32 h39.37 r1
  text "L" at 5514.36,3424.6 h23.62 r270
  text "D1" at 4037.98,3416 h23.62 r90
  text "B1" at 4637.98,3416 h23.62 r90
  text "A1" at 4437.98,3414.95 h23.62 r90
  text "NC" at 3737.98,3410.65 h23.62 r90
  text "D3" at 4137.98,3411.15 h23.62 r90
  text "D5" at 4237.98,3411.15 h23.62 r90
  text "D7" at 4337.98,3411.15 h23.62 r90
  text "B3" at 4737.98,3411.15 h23.62 r90
  text "A3" at 4537.98,3410.1 h23.62 r90
  text "GND" at 3637.98,3399.6 h23.62 r90
  text "/CS" at 3937.89,3388.74 h23.62 r97
  text "/WR" at 3837.92,3385.83 h23.62 r96
  text "NC" at 5237.98,3364.4 h23.62 r90
  text "GND" at 5037.98,3353.35 h23.62 r90
  text "GND" at 5137.98,3353.35 h23.62 r90
  text "VCC" at 4837.98,3351.7 h23.62 r90
  text "VCC" at 4937.98,3351.7 h23.62 r90
  text "AGND" at 5337.98,3341.2 h23.62 r90
  text "AVCC" at 5437.98,3339.6 h23.62 r90
  text "R" at 5514.36,3324.6 h23.62 r270
  text "D0" at 4037.98,3314.6 h23.62 r90
  text "D2" at 4137.98,3314.6 h23.62 r90
  text "D4" at 4237.98,3314.6 h23.62 r90
  text "D6" at 4337.98,3314.6 h23.62 r90
  text "A0" at 4437.98,3314.6 h23.62 r90
  text "A2" at 4537.98,3314.6 h23.62 r90
  text "B0" at 4637.98,3314.6 h23.62 r90
  text "B2" at 4737.98,3314.6 h23.62 r90
  text "/IC" at 3837.8,3303.25 h23.62 r100
  text "CLK" at 3637.98,3299.6 h23.62 r90
  text "/RD" at 3937.87,3295.84 h23.62 r98
  text "/IRQ" at 3737.95,3290.42 h23.62 r94
Bottom Overlay:
  text "JLCJLCJLCJLC" at 4840,3196.38 h47.24

## Text inside footprints (layer, text, board x,y; h text height)
RV1: Top Overlay "RK097" at 6445.9,5270 h20 r90